# Altium PCB Aptomat_Power.PcbDoc
Units mm, origin at the board's own origin, x right, y up, seen from the top; angles counter-clockwise.
Board outline 90 x 47 mm, 2 copper layers (Top Layer, Bottom Layer); 52 components, 30 nets, 140 pads, 66 vias.
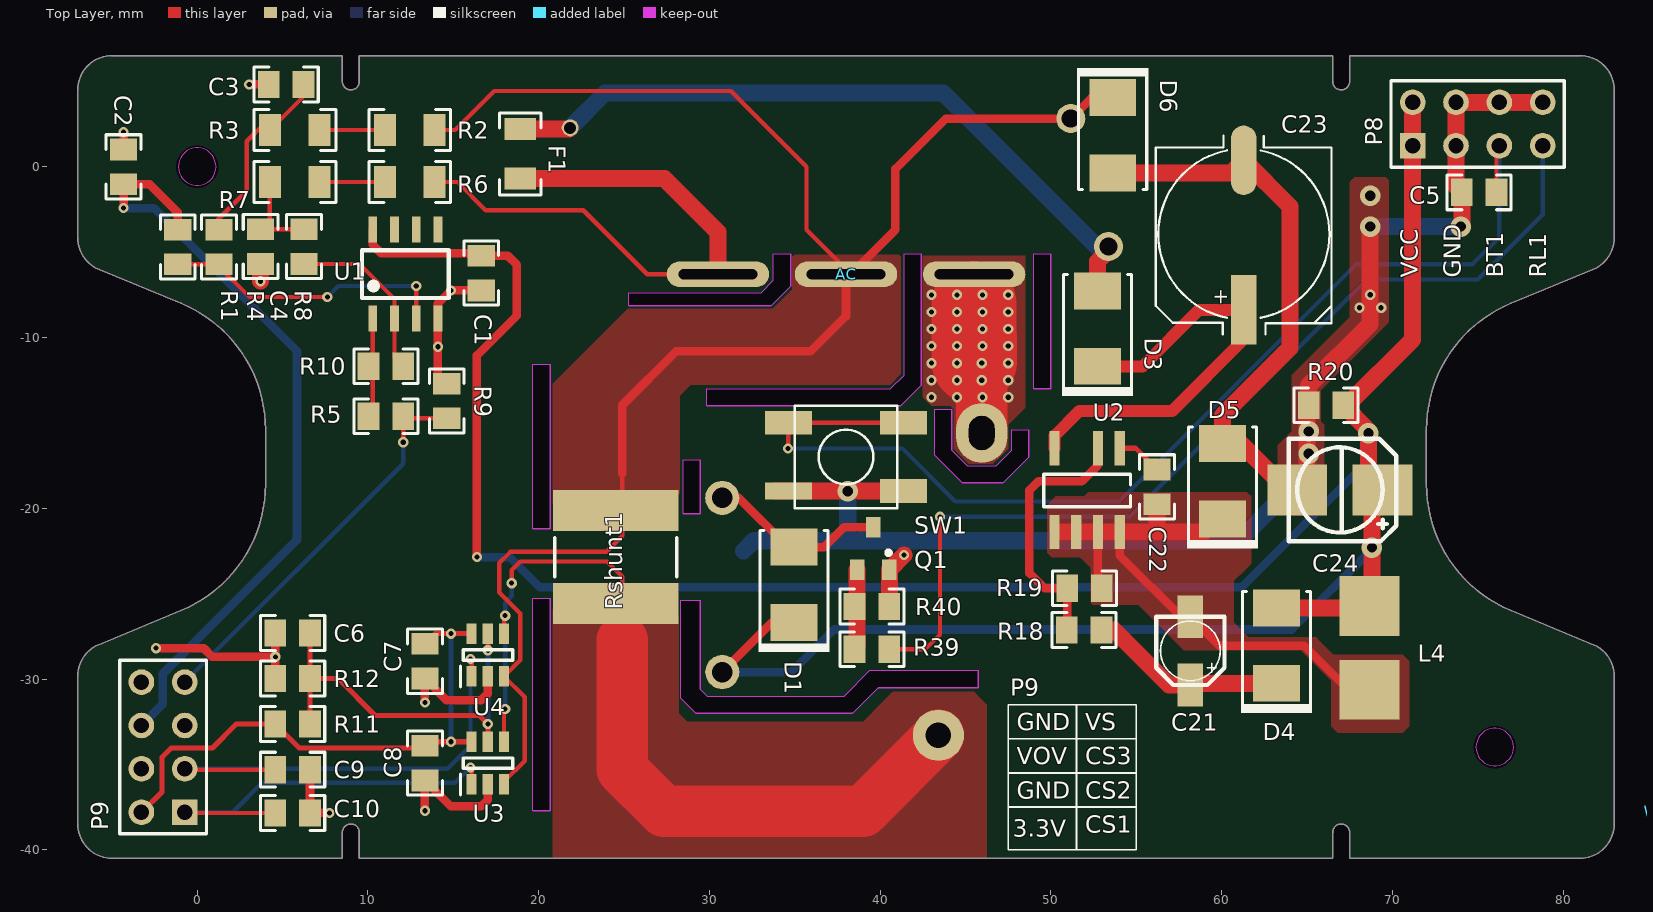
[diagram p0: Top Layer view]
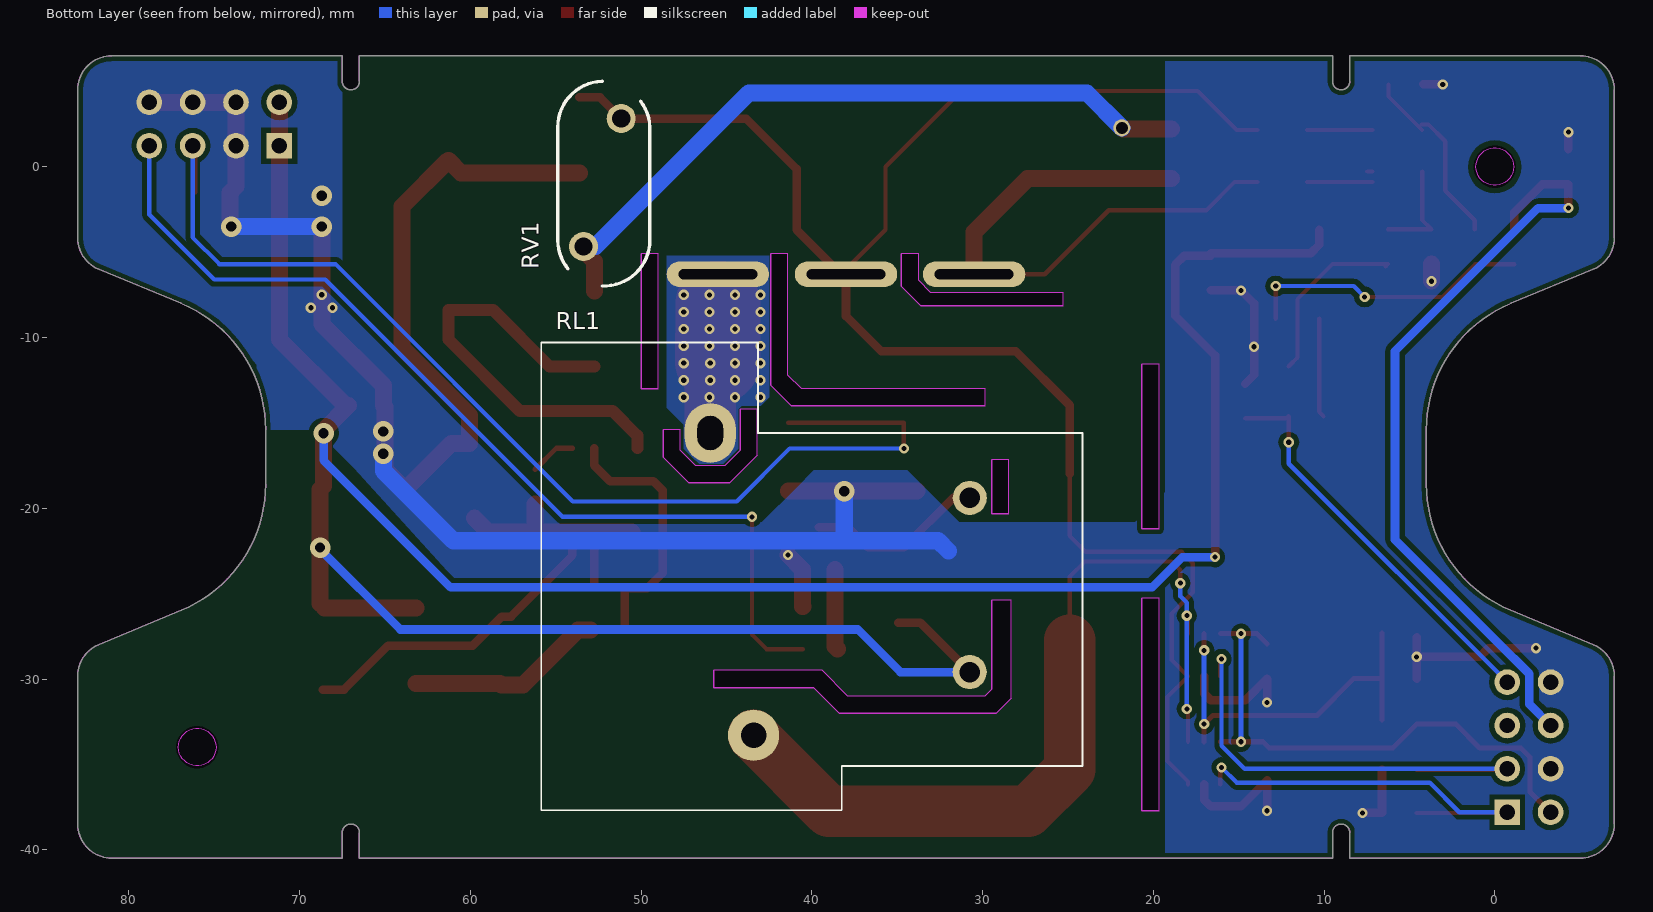
[diagram p1: Bottom Layer view, seen from below]

## Layer stack, top to bottom
Top Solder: solder mask 0.0102, Solder Resist, Dk 3.5
Top Layer: signal copper 0.0356
Dielectric 1: dielectric 0.32, FR-4, Dk 4.8
Bottom Layer: signal copper 0.0356
Bottom Solder: solder mask 0.0102, Solder Resist, Dk 3.5

## Board outline
-7.002,-38.492 -7.002,-29.829 cw(c-5.002,-29.829) -5.767,-27.981 -0.941,-25.982 ccw(c-4.002,-18.591) 3.998,-18.591 3.998,-15.394 ccw(c-4.002,-15.394) -0.941,-8.003 -5.767,-6.004 cw(c-5.002,-4.156) -7.002,-4.156 -7.002,4.508 cw(c-5.002,4.508) -5.002,6.508 8.498,6.508 8.498,5.008 ccw(c8.998,5.008) 9.498,5.008 9.498,6.508 66.498,6.508 66.498,5.008 ccw(c66.998,5.008) 67.498,5.008 67.498,6.508 80.998,6.508 cw(c80.998,4.508) 82.998,4.508 82.998,-4.156 cw(c80.998,-4.156) 81.763,-6.004 76.937,-8.003 ccw(c79.998,-15.394) 71.998,-15.394 71.998,-18.591 ccw(c79.998,-18.591) 76.937,-25.982 81.763,-27.981 cw(c80.998,-29.829) 82.998,-29.829 82.998,-38.492 cw(c80.998,-38.492) 80.998,-40.492 67.498,-40.492 67.498,-38.992 ccw(c66.998,-38.992) 66.498,-38.992 66.498,-40.492 9.498,-40.492 9.498,-38.992 ccw(c8.998,-38.992) 8.498,-38.992 8.498,-40.492 -5.002,-40.492 cw(c-5.002,-38.492)
cut-out: 19.663,-21.209 19.663,-11.557 20.663,-11.557 20.663,-21.209
cut-out: 28.456,-20.32 28.456,-17.145 29.456,-17.145 29.456,-20.32
cut-out: 29.206,-32 28.321,-31.115 28.321,-25.4 29.464,-25.4 29.464,-30.607 29.844,-30.987 37.9,-31 39.4,-29.5 45.75,-29.5 45.75,-30.5 39.9,-30.5 38.4,-32
cut-out: 19.663,-37.719 19.663,-25.273 20.663,-25.273 20.663,-37.719
cut-out: 25.273,-8.128 25.273,-7.366 33.034,-7.366 33.75,-6.65 33.75,-5.08 34.75,-5.08 34.75,-7 33.622,-8.128
cut-out: 29.845,-14 29.845,-13 40.6,-13 41.4,-12.2 41.4,-5.08 42.4,-5.08 42.4,-12.8 41.2,-14
cut-out: 49,-13 49,-5.08 50,-5.08 50,-13
cut-out: 44.796,-18.504 43.196,-16.904 cw(c43.2,-16.9) 43.195,-16.9 43.195,-14.2 cw(c43.2,-14.2) 43.2,-14.195 44.2,-14.195 cw(c44.2,-14.2) 44.205,-14.2 44.205,-16.598 45.102,-17.495 46.798,-17.495 47.695,-16.598 47.695,-15.4 cw(c47.7,-15.4) 47.7,-15.395 48.7,-15.395 cw(c48.7,-15.4) 48.705,-15.4 48.705,-17 cw(c48.7,-17) 48.704,-17.004 47.204,-18.504 cw(c47.2,-18.5) 47.2,-18.505 44.8,-18.505 cw(c44.8,-18.5)

## Design rules (kind name [scope] priority, off if disabled: settings)
Clearance Clearance_1 [InNet('GND')] p1: gap=0.3
Clearance cutout [IsRegion] p2: gap=0.01
Clearance keepout [OnLayer('Keep-Out Layer')] p3: gap=0.01
Clearance [All] p4: gap=0.254
HoleSize [All] p1: absolutevalues=TRUE maxlimit=5 minlimit=0.01 maxpercent=80.000 minpercent=20.000
MinimumSolderMaskSliver [All] p1: minsoldermaskwidth=0.01
PolygonConnect [All] p1: connectstyle=Direct reliefconductorwidth=0.254 reliefentries=4 polygonreliefangle="90 Angle" airgapwidth=0.254
RoutingVias [All] p1: holewidth=0.3 width=0.6 viastyle="Through Hole" minholewidth=0.3 minwidth=0.6 maxholewidth=5 maxwidth=5
SilkToSilkClearance [All] p1: silktosilkclearance=0.1
SilkToSolderMaskClearance [IsPad] p1: minsilkscreentomaskgap=0.01 clearancetoexposedcopper=TRUE
SolderMaskExpansion [All] p1: expansion=0.102
Width [All] p1: maxlimit=5 minlimit=0.254 preferedwidth=0.254
26 further rules are at their usual default settings.

## Components (designator, comment, footprint, x,y, rotation, side; value= is the part's Value field where it differs from the comment)
AC "Header 3" CHAN3DONG 30.498,-6.292 r0 top
C1 "104" 0805_HV 16.637,-6.223 r90 top
C2 "104" 0805_HV -4.318,0 r270 top
C3 "221" 0805_HV 5.207,4.826 r0 top
C4 "221" 0805_HV 3.708,-4.674 r90 top
C5 "221" 0805_HV 75.082,-1.499 r0 top
C6 "104" 0805_HV 5.588,-27.305 r0 top
C7 "104" 0805_HV 13.335,-28.956 r90 top
C8 "104" 0805_HV 13.335,-34.925 r90 top
C9 "102" 0805_HV 5.588,-35.306 r180 top
C10 "102" 0805_HV 5.588,-37.846 r180 top
C21 "10uF" TU_NHOM_10uF_MH 58.166,-28.346 r0 top
C22 "104" 0805_HV 56.21,-18.745 r90 top
C23 "400AX6R8M8x11" PANACAP-G-GENERIC 61.29,-3.937 r90 top
C24 "220uF" TU_NHOM_2.5_MH 66.929,-18.923 r270 top
D1 "US1M-13-F" SMB 34.95,-24.486 r270 top
D3 "US1M-13-F" SMB 52.73,-9.474 r270 top
D4 "US1M-13-F" SMB 63.221,-28.041 r270 top
D5 "US1M-13-F" SMB 60.046,-18.415 r270 top
D6 "US1M-13-F" SMB 53.619,1.854 r90 top
F1 "Res" 1206 18.923,0.762 r90 top
L4 "680uF" "Inductor 4.5x5" 68.758,-28.423 r270 top
P8 "Header 4X2" HDR2X4 71.188,1.237 r0 top
P9 "Header 4X2" HDR2X4 -0.732,-37.803 r90 top
Q1 "C1815" SOT23B 39.599,-22.352 r180 top
R1 "22K" 0805_HV -1.143,-4.699 r90 top
R2 "1.2M" 1206 12.446,2.159 r180 top
R3 "1.2M" 1206 5.715,2.159 r180 top
R4 "2.2K" 0805_HV 1.27,-4.699 r90 top
R5 "10K" 0805_HV 11.049,-14.605 r180 top
R6 "1.2M" 1206 12.446,-0.889 r180 top
R7 "1.2M" 1206 5.715,-0.889 r180 top
R8 "2.2K" 0805_HV 6.248,-4.674 r90 top
R9 "10K" 0805_HV 14.605,-13.716 r90 top
R10 "22K" 0805_HV 11.049,-11.684 r0 top
R11 "2K" 0805_HV 5.588,-32.639 r0 top
R12 "2K" 0805_HV 5.588,-29.972 r180 top
R18 "13k" 0805_HV 51.943,-27.127 r0 top
R19 "2K" 0805_HV 51.968,-24.689 r180 top
R20 "3k3" 0805_HV 66.116,-13.97 r0 top
R39 "1K" 0805_HV 39.516,-28.25 r0 top
R40 "10K" 0805_HV 39.516,-25.75 r0 top
RL1 "Component_1" RELAY30ASLA12VDC 45.95,-15.593 r180 bottom locked
Rshunt1 "0.006R" RESC2728 24.511,-22.86 r90 top
RV1 "S10K275E2" VAR_S10K275E2 52.181,-0.984 r270 bottom
SW1 "PB SW" Switch-PB-6.2x6.3mm-SMD 37.998,-16.992 r180 top locked
U1 "LM358 SOP8_MH" "SOP 8" 12.192,-6.286 r0 top
U2 "LNK306" "SOP 7" 54.026,-16.485 r270 top
U3 "INA181A4IDBVT" SOT95P280X145-6N 17.018,-34.925 r90 top
U4 "INA181A1IDBVT" SOT95P280X145-6N 17.018,-28.595 r90 top
Wp1 "Socket" PIN1 37.303,-48.452 r0 top
Wp2 "Socket" PIN1 85.75,-37.75 r0 top

## Footprints (in the part's own frame and the unit in brackets; to place one, negate y for a bottom-side part, rotate by r counter-clockwise, add the part's x,y. Pads: shape width x height; smd on the part's side, far side on the other; paste and mask are expansions set on the pad)
0805_HV [mil] "0805 with 30mil clearance between pads"
  rect 50x63 smd: 1(-40,0) 2(40,0)
  silkscreen extent -74,-40 74,40, body extent -43,-29 43,29, height 57
1206 [mm] "1206 from SM-752 data"
  rect 1.3x1.85 smd: 1(1.45,0) 2(-1.45,0)
  silkscreen extent -2.4,-1.21 2.4,1.21, body extent -1.7,-0.9 1.7,0.9, height 1.35
CHAN3DONG [mm]
  oval 6x1.5 hole 0.6 slot 4.6 at 0 deg: 1(0,0) 2(7.5,0) 3(15,0)
HDR2X4 [mm] "Connector; Header; 4x2 Position"
  rect 1.5x1.5 hole 0.9: 1(0,0)
  round 1.5 hole 0.9: 2(0,2.54) 3(2.54,0) 4(2.54,2.54) 5(5.08,0) 6(5.08,2.54) 7(7.62,0) 8(7.62,2.54)
  silkscreen extent -1.27,-1.27 8.89,3.81
"Inductor 4.5x5" [mm]
  rect 3.5x3.5 smd: 1(2.2,-0.1) 2(-2.7,-0.1)
  body extent -2.6,-2.6 2.2,2.2, height 2
PANACAP-G-GENERIC [mil]
  rect 160x59.06 smd: 1(-175,0)
  oval 160x59.06 smd: 2(170,0)
  silkscreen extent -231,-203 227,203, body extent -233,-203 223,203, height 402
PIN1 [mm] "Connector; Plug"
RELAY30ASLA12VDC [mm]
  round 2 hole 1.2 paste+0 mask+0: 1(15.202,-3.8) 2(15.2,-14)
  round 3 hole 1.5 paste+0 mask+0: 3(2.54,-17.7)
  oval 3x3.5 hole 1.5 slot 2 at 90 deg paste+0 mask+0: 4(0,0)
  silkscreen extent -9.9,-22.1 21.8,5.3
RESC2728 [mm] "Chip Resistor, 2-Leads, Body 6.9x7.1mm, IPC Medium Density"
  rect 2.4x7.35 smd: 1(-2.725,0) 2(2.725,0)
  silkscreen extent -1.15,-3.58 1.15,3.57, body extent -3.55,-3.65 3.55,3.65, height 0.6
SMB [mm] "Molded Diode, 2-Leads, Body 5.4x3.6mm, IPC Medium Density, based on OnSemi component dimensions"
  rect 2.159x2.743 smd: 1(2.21,0) 2(-2.21,0)
  silkscreen extent -3.18,-2.08 3.94,2.08, body extent -2.7,-1.8 2.7,1.8, height 2.32
"SOP 7" [mm]
  rect 2x0.6 smd: 1(0,0) 2(0,-1.27) 4(0,-3.81) 5(4.9,-3.81) 6(4.9,-2.54) 7(4.9,-1.27) 8(4.9,0)
  silkscreen extent 1.52,-4.44 3.43,0.64, body extent -0.66,-4.38 5.39,0.52, height 1.36
"SOP 8" [mil]
  rect 20x60 smd: 1(-75,-102.5) 2(-25,-102.5) 3(25,-102.5) 4(75,-102.5) 5(75,102.5) 6(25,102.5) 7(-25,102.5) 8(-75,102.5)
  silkscreen extent -100,-55 100,55, body extent -98,-120 100,117, height 63
SOT23B [mm] "SOT 23B"
  rect 0.85x1.2 smd: 1(0.95,1.25) 2(0,-1.25) 3(-0.94,1.245)
  silkscreen extent -1.02,0.13 -0.77,0.38, body extent -1.5,-1.2 1.5,1.3, height 1.06
SOT95P280X145-6N [mm]
  rect 1.2x0.6 smd: 1(-1.25,0.95) 2(-1.25,0) 3(-1.25,-0.95) 4(1.25,-0.95) 5(1.25,0) 6(1.25,0.95)
  silkscreen extent -1.85,-1.45 0.3,1.6, body extent -1.4,-1.45 1.4,1.45, height 1.45
Switch-PB-6.2x6.3mm-SMD [mm]
  rect 2.75x1.4 smd: 1(-3.375,2) 2(-3.375,-2) 2(3.375,-2)
  rect 2.75x1 smd: 1(3.375,2)
  silkscreen extent -3,-3 3,3, body extent -4,-3 4,3.3, height 3.1
TU_NHOM_2.5_MH [mm]
  rect 3x3.5 smd: 1(0,2.5) 2(0,-2.5)
  silkscreen extent -3,-3 3,3.3, body extent -3.3,-3.5 3.3,3.5, height 8.11
TU_NHOM_10uF_MH [mm]
  rect 1.5x2.5 smd: 1(0,-2) 2(0,2)
  silkscreen extent -2,-2 2,2, body extent -2.15,-2.5 2.15,2.5, height 5.4
VAR_S10K275E2 [mm] "EPCOS"
  round 1.7 hole 1.067: 1(-3.81,1.016) 2(3.69,-1.184)
  silkscreen extent -6,-2.7 6,2.7, body extent -6.02,-2.7 5.98,2.7, height 15

## Part data
AC: "Header, 3-Pin"
C1 C2 C3 C4 C5 C6 C7 C8 C9 C10 C22: library part CM, "Cap SMD"
C21: library part TU_NHOM_10uF_25V_MH, "TU_NHOM_10uF_25V_MH"
C23: "CAP, AL, 6.8uF, 400V, +/-20%, TH"
C24: library part TU_NHOM_220uF_25V_MH, "TU_NHOM_220uF_25V_MH"
D1 D3 D4 D5 D6: library part MURS160-13-F, "Diode, Ultrafast, 600V, 1A, SMB"
F1: library part Res-SMD, "Resistor"
L4: library part "Inductor 4.5x5_MH"
P8 P9: "Header, 4-Pin, Dual row"
Q1: "NPN 600mW, ECB"
R1 R2 R3 R4 R5 R6 R7 R8 R9 R10 R11 R12 R18 R19 R20 R39 R40 Rshunt1: library part R, "Resistor 1/4W"
RV1: "Varistor 275V RMS 10MM Radial, TH"
SW1: library part Switch-PB-6.2x6.3mm-SMD, "Tactile Switch, SPNO, SMD, 160gf, 6.2x6.3x2.5mm"
U2: library part Component_1
U3 U4: library part INA181

## Free pads (board coordinates)
  round 1 hole 0.7 paste+0: 0(21.844,2.286)
  round 2 hole 2.5 paste+0: 2(0,0) 3(76,-34)

## Via types
v1: diameter 0.6, hole 0.3, Top Layer to Bottom Layer, tented both sides, 58 vias
v2: diameter 1.2, hole 0.6, Top Layer to Bottom Layer, tented both sides, 8 vias

## Nets (pads, with @x,y where several pads share a name; then routed paths per layer and width w, separated by ;. In a path a pad name is that pad's centre, name@x,y a point inside that pad or via, vN(x,y) a via of type N, cw(c..) or ccw(c..) an arc to the next point about the centre after c; other vN are vias at no path point)
3.3V: C7.2 C8.2 P9.2 R11.1 U3.6 U4.6 | length 32.7
  Top Layer w0.3: P9.2 -3.259,-37.803 -2.072,-36.616 -2.072,-34.584 -1.524,-34.036 0.889,-34.036 2.286,-32.639 R11.1 5.969,-34.036 13.208,-34.036 C8.2 13.569,-33.675 v1(14.859,-33.675) U3.6 ; C7.2 13.93,-27.345 v1(14.859,-27.345) U4.6
  Bottom Layer w0.3: v1(14.859,-33.675) v1(14.859,-27.345)
BP: C22.2 U2.1 | length 2.7
  Top Layer w0.3: U2.1 54.966,-16.485 C22.2
BUTTON1: C5.2 P8.5 SW1.2 | length 65.8
  Top Layer w0.254: v1(34.6,-16.5) 34.623,-16.477 34.623,-14.992 SW1.2@41.373,-14.992 ; C5.2 76.098,1.068 P8.5
  Bottom Layer w0.254: v1(34.6,-16.5) 41.3,-16.5 44.4,-19.6 54,-19.6 67.9,-5.7 74.7,-5.7 76.268,-4.132 P8.5
CURRENT_SIGNAL1: C10.2 P9.1 U3.1 | length 24.2
  Top Layer w0.254: P9.1 -0.688,-37.846 C10.2 ; v1(16.002,-35.179) 16.068,-35.245 U3.1
  Bottom Layer w0.254: P9.1 2.075,-37.803 3.81,-36.068 15.113,-36.068 v1(16.002,-35.179)
CURRENT_SIGNAL2: C9.2 P9.3 U4.1 | length 28.7
  Top Layer w0.254: P9.3 -0.688,-35.306 C9.2 ; v1(16.002,-28.829) 16.068,-28.895 U4.1
  Bottom Layer w0.254: P9.3 14.648,-35.263 16.002,-33.909 v1(16.002,-28.829)
CURRENT_SIGNAL3: P9.5
FB: R18.1 R19.2 U2.2 | length 15.5
  Top Layer w0.5: R18.1 50.952,-27.102 R19.2 49.632,-24.689 48.743,-23.8 48.743,-18.948 49.276,-18.415 51.816,-18.415 52.756,-17.475 U2.2
GND: C1.1 C2.1 C3.1 C4.1 C5.1 C6.1 C7.1 C8.1 C9.1 C10.1 C23.2 C24.2 D5.2 D6.2 P8.3 P8.4 P8.6 P8.8 P9.4 P9.8 Q1.3 R9.2 R12.2 R20.1 R40.2 SW1.1 U1.4 U3.2 U4.2 | length 155.5
  Top Layer w0.5: C2.1 v1(-4.318,2.032) ; v1(-2.413,-28.194) 0.381,-28.194 0.889,-28.702 v1(4.572,-28.702) ; v1(3.048,4.826) C3.1 ; R12.2 v1(4.572,-28.702) ; C6.1@4.572,-27.559 4.572,-28.448 v1(4.572,-28.702) ; C9.1 C10.1 v1(7.747,-37.846) ; v1(13.335,-37.719) C8.1 14.859,-37.465 16.637,-37.465 17.018,-37.084 U3.2 ; v1(13.335,-31.369) C7.1 14.605,-31.242 16.637,-31.242 17.018,-30.861 U4.2 ; R9.2 14.097,-12.192 v1(14.097,-10.541) U1.4 14.097,-8.001 v1(14.859,-7.239) C1.1
  Top Layer w1: v1(3.7,-6.7) 3.708,-6.692 C4.1 ; SW1.1@33.851,-18.992 34.623,-18.992 SW1.1@41.373,-18.992 ; R40.2 40.538,-25.744 Q1.3 v1(41.402,-22.733) ; D6.2 60.554,-0.356 C23.2 64,-2.329 64,-10.6 60.046,-14.554 D5.2 61.116,-16.205 63.809,-18.898 65,-17.706 65,-14.07 R20.1 65.1,-12.8 68.7,-9.2 68.7,-7.493 v2(68.7,-3.5) ; v2(74,-3.5) 74.066,-3.434 C5.1 73.728,-1.16 P8.3 P8.4 P8.6 P8.8
  Bottom Layer w1: 32,-22.5 32.6,-21.9 38.1,-21.9 ; v2(38.1,-19) 38.1,-21.9 ; v2(65.1,-16.8) 65.1,-17.8 61,-21.9 38.1,-21.9 ; v2(68.7,-3.5) v2(74,-3.5)
  other v1: 68.072,-8.255 69.342,-8.255 68.707,-7.493
  other v2: 65.1,-15.5 68.7,-1.7
L: AC.2 D6.1 R2.2 Rshunt1.2 RV1.1 U3.3 U4.3 | length 101.9
  Top Layer w0.254: R2.2 15.113,2.159 17.399,4.445 31.242,4.445 35.687,0 35.687,-3.683 AC.2@37.998,-5.994 ; U3.3 17.968,-36.007 19.177,-34.798 19.177,-31.054 U4.3 18.923,-28.89 18.923,-26.162 17.678,-24.917 17.678,-23.216 18.339,-22.555 23.952,-22.555 24.892,-21.615 24.892,-17.985
  Top Layer w0.5: 24.892,-17.985 24.892,-13.97 28.067,-10.795 35.941,-10.795 37.998,-8.738 AC.2 ; AC.2@37.998,-5.994 AC.2 ; D6.1 52.403,4.064 RV1.1 43.847,2.826 40.894,-0.127 40.894,-3.683 38.285,-6.292 AC.2
L1: AC.3 RL1.4 | length 7.6
  Top Layer w3: RL1.4 v1(45.95,-12.5) v1(45.95,-11.5) v1@45.95,-11.381
  Top Layer w5: 45.498,-8.026 45.499,-8.499 45.499,-8.501 45.499,-8.999 45.499,-9.499 45.499,-9.501 45.499,-9.999 45.5,-10.499 45.5,-10.501 45.5,-11.4
  other v1: 43,-13.5 44.5,-13.5 46,-13.5 47.5,-13.5 43,-12.5 44.5,-12.5 47.5,-12.5 43,-11.5 44.5,-11.5 47.5,-11.5 43,-10.5 44.5,-10.5 46,-10.5 47.5,-10.5 43,-9.5 44.5,-9.5 46,-9.5 47.5,-9.5 43,-8.5 44.5,-8.5 46,-8.5 47.5,-8.5 43,-7.5 44.5,-7.5 46,-7.5 47.5,-7.5
LOUT: RL1.3 Rshunt1.1 U3.4 U4.4 | length 51.1
  Top Layer w0.254: U3.4 17.968,-31.816 v1(18.034,-31.75) ; U4.4 17.968,-26.355 v1(18.034,-26.289) ; v1(18.415,-24.384) 18.415,-23.622 18.923,-23.114 24.003,-23.114 24.892,-24.003 24.892,-27.735
  Top Layer w3: 24.892,-27.735 24.892,-35.306 27.336,-37.75 39,-37.75 43.41,-33.34 RL1.3
  Bottom Layer w0.254: v1(18.034,-31.75) v1(18.034,-26.289) 18.034,-25.527 18.415,-25.146 v1(18.415,-24.384)
N: AC.1 F1.2 R6.2 | length 34.2
  Top Layer w0.254: R6.2 15.24,-0.889 16.891,-2.54 22.606,-2.54 26.358,-6.292 AC.1
  Top Layer w1: F1.2 27.358,-0.688 30.498,-3.828 AC.1
NetC3_2: C3.2 R3.1 R4.2 | length 11.2
  Top Layer w0.254: R4.2@1.168,-3.658 1.168,-3.132 2.9,-1.4 2.9,1.503 3.878,2.481 R3.1@4.289,2.481 ; R3.1 6.223,4.117 C3.2
NetC4_2: C4.2 R7.1 R8.2 | length 6.2
  Top Layer w0.254: R7.1@4.255,-0.273 4.255,-3.111 C4.2 R8.2
NetC21_1: C21.1 D4.1 R18.2 | length 11.6
  Top Layer w1: R18.2 53.696,-27.127 56.915,-30.346 C21.1 58.261,-30.252 D4.1@63.195,-30.252
NetD1_2: D1.2 Q1.2 RL1.1 | length 10.5
  Top Layer w0.5: RL1.1 31.712,-19.393 34.595,-22.276 D1.2 36.724,-22.276 37.898,-21.102 Q1.2
NetQ1_1: Q1.1 R39.1 R40.1 | length 4.7
  Top Layer w1: R39.1 38.649,-28.101 Q1.1
NetR1_1: R1.1 R4.1 U1.3 | length 16.9
  Top Layer w0.254: R1.1 1.143,-5.715 3.055,-7.627 7.613,-7.627 v1(7.62,-7.62) ; U1.3 v1(12.827,-6.985)
  Bottom Layer w0.254: v1(7.62,-7.62) 8.255,-6.985 v1(12.827,-6.985)
NetR2_1: R2.1 R3.2 | length 3.8
  Top Layer w0.254: R3.2 R2.1
NetR6_1: R6.1 R7.2 | length 4.2
  Top Layer w0.254: R7.2@7.155,-0.273 R7.2@7.474,-0.273 ; R7.2 R6.1
NetR8_1: R8.1 R10.2 U1.2 | length 10.5
  Top Layer w0.254: R8.1@6.375,-5.817 R8.1 9.5,-5.69 11.557,-7.747 U1.2 11.557,-11.176 R10.2
NN: D3.2 F1.1 pad.0 RV1.2 | length 41.9
  Top Layer w1: F1.1 21.77,2.212 pad.0 ; D3.2 52.73,-5.537 53.442,-4.826 RV1.2@53.326,-4.826
  Bottom Layer w1: pad.0 23.876,4.318 43.688,4.318 52.68,-4.674 RV1.2
RL1C: P8.7 R39.2 | length 56.9
  Top Layer w0.254: R39.2 42.65,-28.25 43.5,-27.4 v1(43.5,-20.5)
  Bottom Layer w0.254: v1(43.5,-20.5) 54.6,-20.5 68.5,-6.6 75,-6.6 78.808,-2.792 P8.7
S: C21.2 C22.1 D5.1 L4.1 R19.1 U2.5 U2.6 U2.7 U2.8 | length 34.1
  Top Layer w0.3: R19.1@52.756,-24.46 R19.1 ; D5.1@59.766,-20.574 59.995,-20.574 D5.1
  Top Layer w0.5: R19.1@52.756,-24.46 U2.7 ; U2.8 54.026,-22.758 57.614,-26.346 C21.2 59.861,-28.042 64.821,-28.042 67.402,-30.623 L4.1
  Top Layer w1: 50.546,-21.385 U2.6 U2.7 U2.8 56.21,-21.385 ; C22.1 56.21,-21.385 ; D5.1@59.766,-20.574 58.956,-21.385 56.21,-21.385
V1: R5.2 R10.1 U1.1 | length 5.8
  Top Layer w0.254: R5.2 10.287,-14.351 U1.1
VCC_RELAY: C1.2 C24.1 D1.1 D4.2 L4.2 P8.1 P8.2 R20.2 RL1.2 U1.8 | length 169.7
  Top Layer w0.5: U1.8 10.287,-4.572 10.774,-5.059 16.637,-5.059 C1.2 18.186,-5.207 18.72,-5.74 18.72,-8.712 16.383,-11.049 v1(16.383,-22.86) ; RL1.2 33.647,-26.696 D1.1 ; L4.2@68.549,-25.832 L4.2 L4.2@68.809,-25.572
  Top Layer w1: D4.2@63.195,-25.832 L4.2@68.549,-25.832 ; L4.2@68.809,-25.572 68.809,-18.898 68.6,-18.689 68.6,-15.438 R20.2 67.33,-13.97 71.188,-10.112 P8.1 P8.2
  Bottom Layer w0.5: v1(16.383,-22.86) 18.288,-22.86 20.066,-24.638 61.162,-24.638 68.6,-17.2 v2(68.6,-15.6) ; RL1.2 34.807,-29.593 37.3,-27.1 64.1,-27.1 68.8,-22.4 v2(68.8,-22.3)
VIN1: C23.1 D3.1 U2.4 | length 25.8
  Top Layer w0.7: U2.4 50.216,-15.748 51.664,-14.3 57.099,-14.3 61.29,-10.109 C23.1 58.674,-8.382 55.372,-11.684 D3.1
VOFFSET_VOL: C2.2 P9.6 R1.2 | length 45.7
  Top Layer w0.254: P9.6 P9.6@-3.223,-32.723
  Top Layer w0.5: v1(-4.318,-2.413) C2.2 -2.794,-1.016 -1.143,-2.667 R1.2
  Bottom Layer w0.5: v1(-4.318,-2.413) -2.54,-2.413 5.842,-10.795 5.842,-21.844 -0.127,-27.813 -0.135,-27.813 -2.018,-29.695 -2.018,-31.469 P9.6
VOL_SIGNAL: P9.7 R5.1 R9.1 | length 23.5
  Top Layer w0.254: v1(12.065,-16.129) R5.1 12.192,-14.732 R9.1
  Bottom Layer w0.254: P9.7 12.065,-17.386 v1(12.065,-16.129)
VREF: C6.2 R11.2 R12.1 U3.5 U4.5 | length 25.3
  Top Layer w0.3: C6.2 R12.1 ; U3.5 v1(17.018,-32.639) 16.51,-32.131 10.414,-32.131 8.255,-29.972 R12.1 ; v1(17.018,-28.321) U4.5 ; R12.1 6.604,-32.385 R12.1
  Bottom Layer w0.3: v1(17.018,-32.639) v1(17.018,-28.321)
pads on no net: U1.5 U1.6 U1.7

## Polygon pours and split planes (outlines as drawn)
L on Top Layer "Bottom Layer-No Net" (solid, remove dead copper, pour order 12): 34.862,-5.271 34.862,-7.175 33.718,-8.319 25.209,-8.318 22.543,-10.986 20.828,-12.7 20.828,-19.708 22.416,-19.875 23.94,-19.875 27.496,-19.875 28.258,-19.113 28.258,-13.399 28.892,-12.764 40.577,-12.763 41.212,-12.128 41.212,-8.7 41.212,-5.271 41.085,-5.143 40.958,-5.143 34.989,-5.143
LOUT on Top Layer "Bottom Layer-No Net" (solid, remove dead copper, pour order 10): 20.828,-25.908 20.828,-40.492 37.994,-40.492 38.608,-39.878 38.608,-32.893 38.608,-32.639 38.481,-32.512 38.469,-32.5 29.75,-32.5 28.69,-32.5 28.194,-32.004 28.194,-26.289 27.559,-25.654 21.082,-25.654
S on Top Layer "Bottom Layer-No Net" (solid, remove dead copper, pour order 18): 61.468,-19.05 55.372,-19.05 52.705,-19.05 52.197,-19.05 51.943,-19.304 51.181,-19.304 50.292,-19.304 49.911,-19.685 49.784,-19.812 49.784,-21.463 49.784,-22.606 50.038,-22.86 50.673,-22.86 51.689,-22.86 51.943,-23.114 52.324,-23.495 52.324,-24.384 52.324,-25.527 52.451,-25.654 52.959,-25.654 55.118,-25.654 57.023,-27.559 57.785,-28.321 60.706,-28.321 64.643,-28.321 65.913,-29.591 66.421,-30.099 66.421,-32.766 66.802,-33.147 68.961,-33.147 70.612,-33.147 70.866,-32.893 70.993,-32.766 70.993,-31.369 70.993,-28.956 70.739,-28.702 70.612,-28.575 69.342,-28.575 66.548,-28.575 65.659,-27.686 65.532,-27.559 63.246,-27.559 61.595,-27.559 60.706,-26.67 60.706,-25.4 60.706,-24.257 61.341,-23.622 61.722,-23.241 61.722,-22.225 61.722,-19.304 61.468,-19.05
LOUT on Top Layer "Bottom Layer-No Net" (solid, remove dead copper, pour order 11): 27.75,-40.492 27.75,-35.25 27.75,-34.5 28.5,-33.75 29.75,-32.5 37.75,-32.5 39,-32.5 40.25,-31.25 40.75,-30.75 44.75,-30.75 45.5,-30.75 45.75,-31 46.25,-31.5 46.25,-32.75 46.25,-40.492
GND on Top Layer "Bottom Layer-No Net" (solid, remove dead copper, pour order 14): 69.8,-0.8 69.6,-0.6 68.2,-0.6 67.8,-0.6 67.6,-0.8 67.5,-0.9 67.5,-1.3 67.5,-8.8 65.3,-11 64.1,-12.2 64.1,-14.4 64.1,-15.5 63.4,-16.2 63.9,-16.7 63.9,-17.4 63.9,-20.1 64.2,-20.4 65.6,-20.4 65.8,-20.2 66,-20 66,-17.6 66,-15.1 65.8,-14.9 65.8,-13.2 65.8,-13.1 67.6,-11.3 69.8,-9.1 69.8,-0.8
GND on Top Layer "Bottom Layer-No Net" (solid, remove dead copper, pour order 15): 64.1,-12.2 64.1,-15.5 63.4,-16.2 63.3,-16.3 63.3,-17.8 65.6,-17.8 65.7,-17.9 65.6,-17.8 65.6,-14.5
L1 on Top Layer "Bottom Layer-No Net" (solid, remove dead copper, pour order 17): 42.5,-5.2 42.5,-8.5 42.5,-13.5 43,-14 43.9,-14 44.1,-14 44.3,-14.2 44.3,-15 44.3,-16.5 44.9,-17.1 45.2,-17.4 46.4,-17.4 46.6,-17.4 47,-17 47.5,-16.5 47.5,-15.3 47.5,-15.1 47.9,-14.7 48.5,-14.1 48.5,-10.7 48.5,-5.2
GND on Bottom Layer "Bottom Layer-No Net" (solid, remove dead copper, pour order 13): 162 vertices, not listed, extent -7.012,-40.492 82.998,6.508
L1 on Bottom Layer "Bottom Layer-No Net" (solid, remove dead copper, pour order 16): 42.5,-5.2 42.5,-8.5 42.5,-13.5 43,-14 43.9,-14 44.1,-14 44.3,-14.2 44.3,-15 44.3,-16.5 44.9,-17.1 45.2,-17.4 46.4,-17.4 46.6,-17.4 47,-17 47.5,-16.5 47.5,-15.3 47.5,-15.1 47.9,-14.7 48.5,-14.1 48.5,-10.7 48.5,-5.2
LOUT on Top Solder "Bottom Layer-No Net" (solid): 20.879,-24.549 20.879,-26.962 20.879,-36.741 22.911,-38.773 24.054,-39.916 30.531,-39.916 43.358,-39.916 44.628,-38.646 45.517,-37.757 45.517,-32.677 45.517,-31.915 44.755,-31.153 44.374,-30.772 42.596,-30.772 41.707,-30.772 40.691,-31.788 39.167,-33.312 36.881,-33.312 28.88,-33.312 28.245,-32.677 28.118,-32.55 28.118,-29.756 28.118,-24.676 27.991,-24.549
L on Top Solder "Bottom Layer-No Net" (solid): 38.075,-5.232 35.611,-5.232 35.306,-5.232 35.154,-5.385 34.9,-5.639 34.9,-6.274 34.9,-7.417 34.646,-7.671 33.909,-8.407 32.283,-8.407 25.273,-8.407 22.987,-10.693 20.93,-12.751 20.93,-17.069 20.93,-20.879 21.031,-20.98 21.133,-20.879 27.584,-20.879 27.94,-20.879 28.016,-20.955 28.194,-20.777 28.194,-18.694 28.194,-13.36 28.575,-12.979 28.854,-12.7 29.337,-12.7 40.538,-12.7 41.173,-12.065 41.173,-10.973 41.173,-5.385 41.046,-5.258
L1 on Top Solder "Bottom Layer-No Net" (solid): 42.672,-5.334 42.672,-11.684 42.672,-13.172 43,-13.5 43.216,-13.716 43.688,-13.716 44.196,-13.716 44.45,-13.97 44.45,-15.748 44.45,-16.51 44.958,-17.018 45.212,-17.272 46.736,-17.272 47.244,-16.764 47.498,-16.51 47.498,-15.24 47.498,-14.986 48.006,-14.478 48.26,-14.224 48.26,-9.398 48.26,-5.334

## Keep-outs
Keep-Out Layer:
  circle w0.013: c75.998,-33.992 r1.1
  circle w0.013: c-0.002,0.008 r1.1
  lines w0.01: 19.663,-37.719 20.663,-37.719 ; 19.663,-21.209 20.663,-21.209 ; 28.456,-20.32 29.456,-20.32 ; 49,-13 50,-13
  lines w0.013: 19.663,-37.719 19.663,-25.273 20.663,-25.273 20.663,-37.719 ; 19.663,-21.209 19.663,-11.557 20.663,-11.557 20.663,-21.209 ; 28.456,-20.32 28.456,-17.145 29.456,-17.145 29.456,-20.32 ; 47.7,-16.5 47.7,-15.4 ; 49,-13 49,-5.08 50,-5.08 50,-13 ; 47.7,-15.4 47.7,-16.6 46.8,-17.5 45.1,-17.5 44.2,-16.6 44.2,-16.5 44.2,-14.2 43.2,-14.2 43.2,-16.5 43.2,-16.9 44.8,-18.5 47.2,-18.5 48.7,-17 48.7,-16.6 48.7,-16.5 48.7,-15.4 47.7,-15.4 ; -7.002,-38.492 ccw(c-5.002,-38.492) -5.002,-40.492 8.498,-40.492 8.498,-38.992 cw(c8.998,-38.992) 9.498,-38.992 9.498,-40.492 66.498,-40.492 66.498,-38.992 cw(c66.998,-38.992) 67.498,-38.992 67.498,-40.492 80.998,-40.492 ccw(c80.998,-38.492) 82.998,-38.492 82.998,-29.829 ccw(c80.998,-29.829) 81.763,-27.981 76.937,-25.982 cw(c79.998,-18.591) 71.998,-18.591 71.998,-15.394 cw(c79.998,-15.394) 76.937,-8.003 81.763,-6.004 ccw(c80.998,-4.156) 82.998,-4.156 82.998,4.508 ccw(c80.998,4.508) 80.998,6.508 67.498,6.508 67.498,5.008 cw(c66.998,5.008) 66.498,5.008 66.498,6.508 9.498,6.508 9.498,5.008 cw(c8.998,5.008) 8.498,5.008 8.498,6.508 -5.002,6.508 ccw(c-5.002,4.508) -7.002,4.508 -7.002,-4.156 ccw(c-5.002,-4.156) -5.767,-6.004 -0.941,-8.003 cw(c-4.002,-15.394) 3.998,-15.394 3.998,-18.591 cw(c-4.002,-18.591) -0.941,-25.982 -5.767,-27.981 ccw(c-5.002,-29.829) -7.002,-29.829 -7.002,-38.492 ; 25.273,-8.128 25.273,-7.366 33.034,-7.366 33.75,-6.65 33.75,-5.08 34.75,-5.08 34.75,-7 33.622,-8.128 25.273,-8.128 ; 28.321,-31.115 28.321,-25.4 29.464,-25.4 29.464,-30.607 29.857,-31 30.226,-31 37.9,-31 39.4,-29.5 45.75,-29.5 45.75,-30.5 39.9,-30.5 38.4,-32 29.464,-32 29.206,-32 28.321,-31.115 ; 29.845,-14 41.2,-14 42.4,-12.8 42.4,-5.08 41.4,-5.08 41.4,-12.2 40.6,-13 29.845,-13 29.845,-14

## Silkscreen, mask and mechanical layers (free items; w line width, h text height)
Top Overlay:
  lines w0.1: 47.5,-37.5 55,-37.5 ; 47.5,-35.5 55,-35.5 ; 47.5,-33.5 55,-33.5 ; 51.504,-40 51.504,-31.5 ; 47.5,-40 47.5,-36 47.5,-31.5 55,-31.5 55,-40 47.5,-40
  text "VCC" at 71.5,-6.5 h1 r90
  text "GND" at 74,-6.5 h1 r90
  text "BT1" at 76.5,-6.5 h1 r90
  text "RL1" at 79,-6.5 h1 r90
  text "P9" at 47.625,-30.988 h1
  text "GND" at 48,-33 h1
  text "VS" at 52,-33 h1
  text "VOV" at 48,-35 h1
  text "CS3" at 52,-35 h1
  text "GND" at 48,-37 h1
  text "CS2" at 52,-37 h1
  text "CS1" at 52,-39 h1
  text "3.3V" at 47.752,-39.243 h1
Top Solder:
  lines w3: 45.5,-7 45.5,-11.7 45.9,-12.1 45.9,-15.4
  lines w4: 24.257,-13.589 27.305,-10.541 36.322,-10.541 37.973,-8.89 37.973,-7.239
  lines w5: 24.257,-18.796 24.257,-13.589 ; 24.892,-26.924 24.892,-33.909 28.483,-37.5 36.322,-37.5 ; 30.25,-37.5 40,-37.5 43,-34.5 43,-33.25
Mechanical 1:
  drawing of 157 lines, arcs and shapes, not listed
Mechanical 3:
  drawing of 355 lines, arcs and shapes, not listed

## Text inside footprints (layer, text, board x,y; h text height)
C23: Top Overlay "+" at 60.315,-8.137 h0.89 r90